# EAGLE board Cansat-2023-1 (EAGLE 9.4.2), part 1 of 2
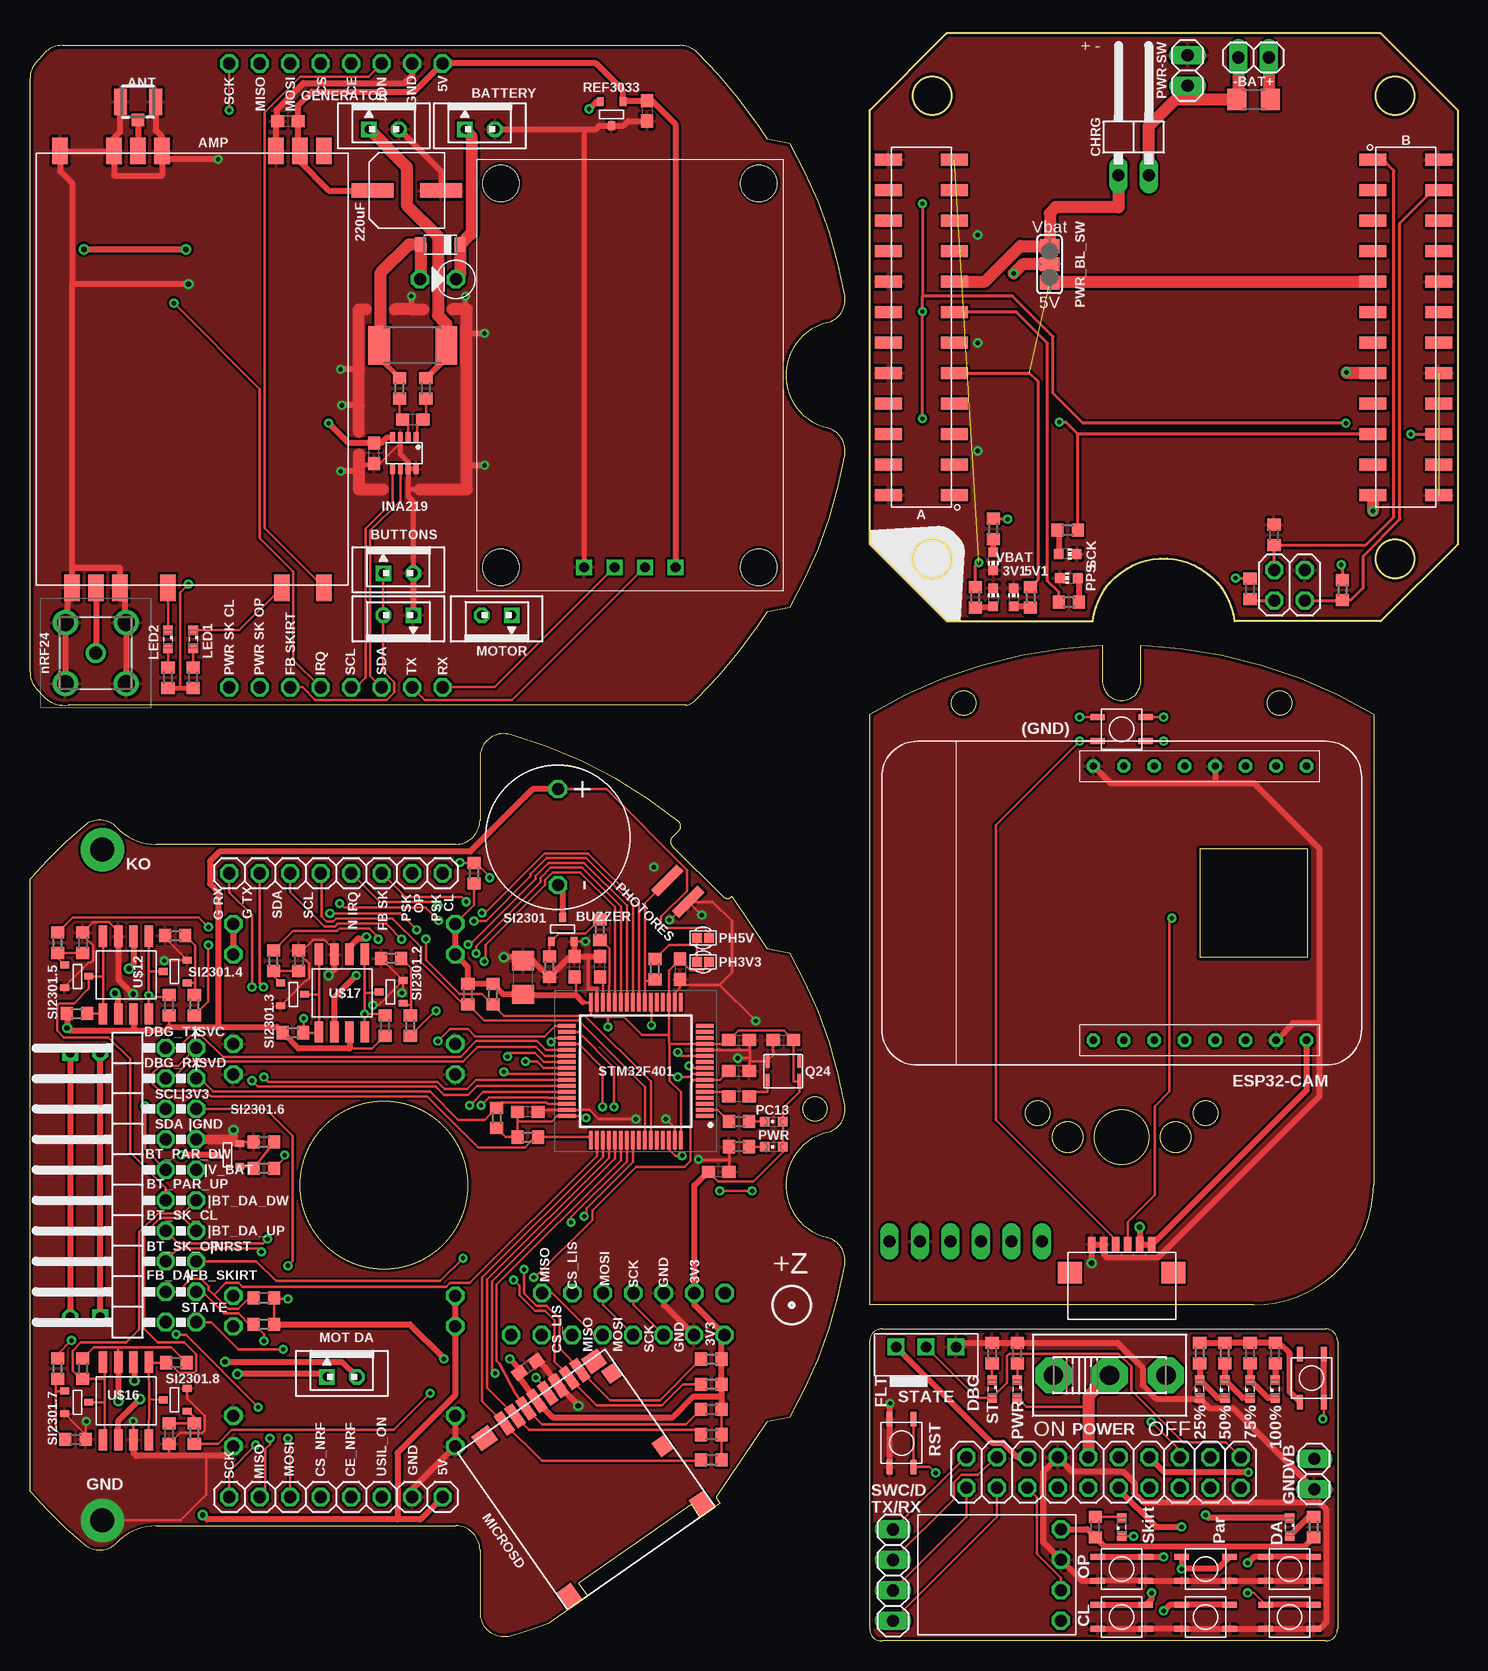
[diagram p0: board, top side]
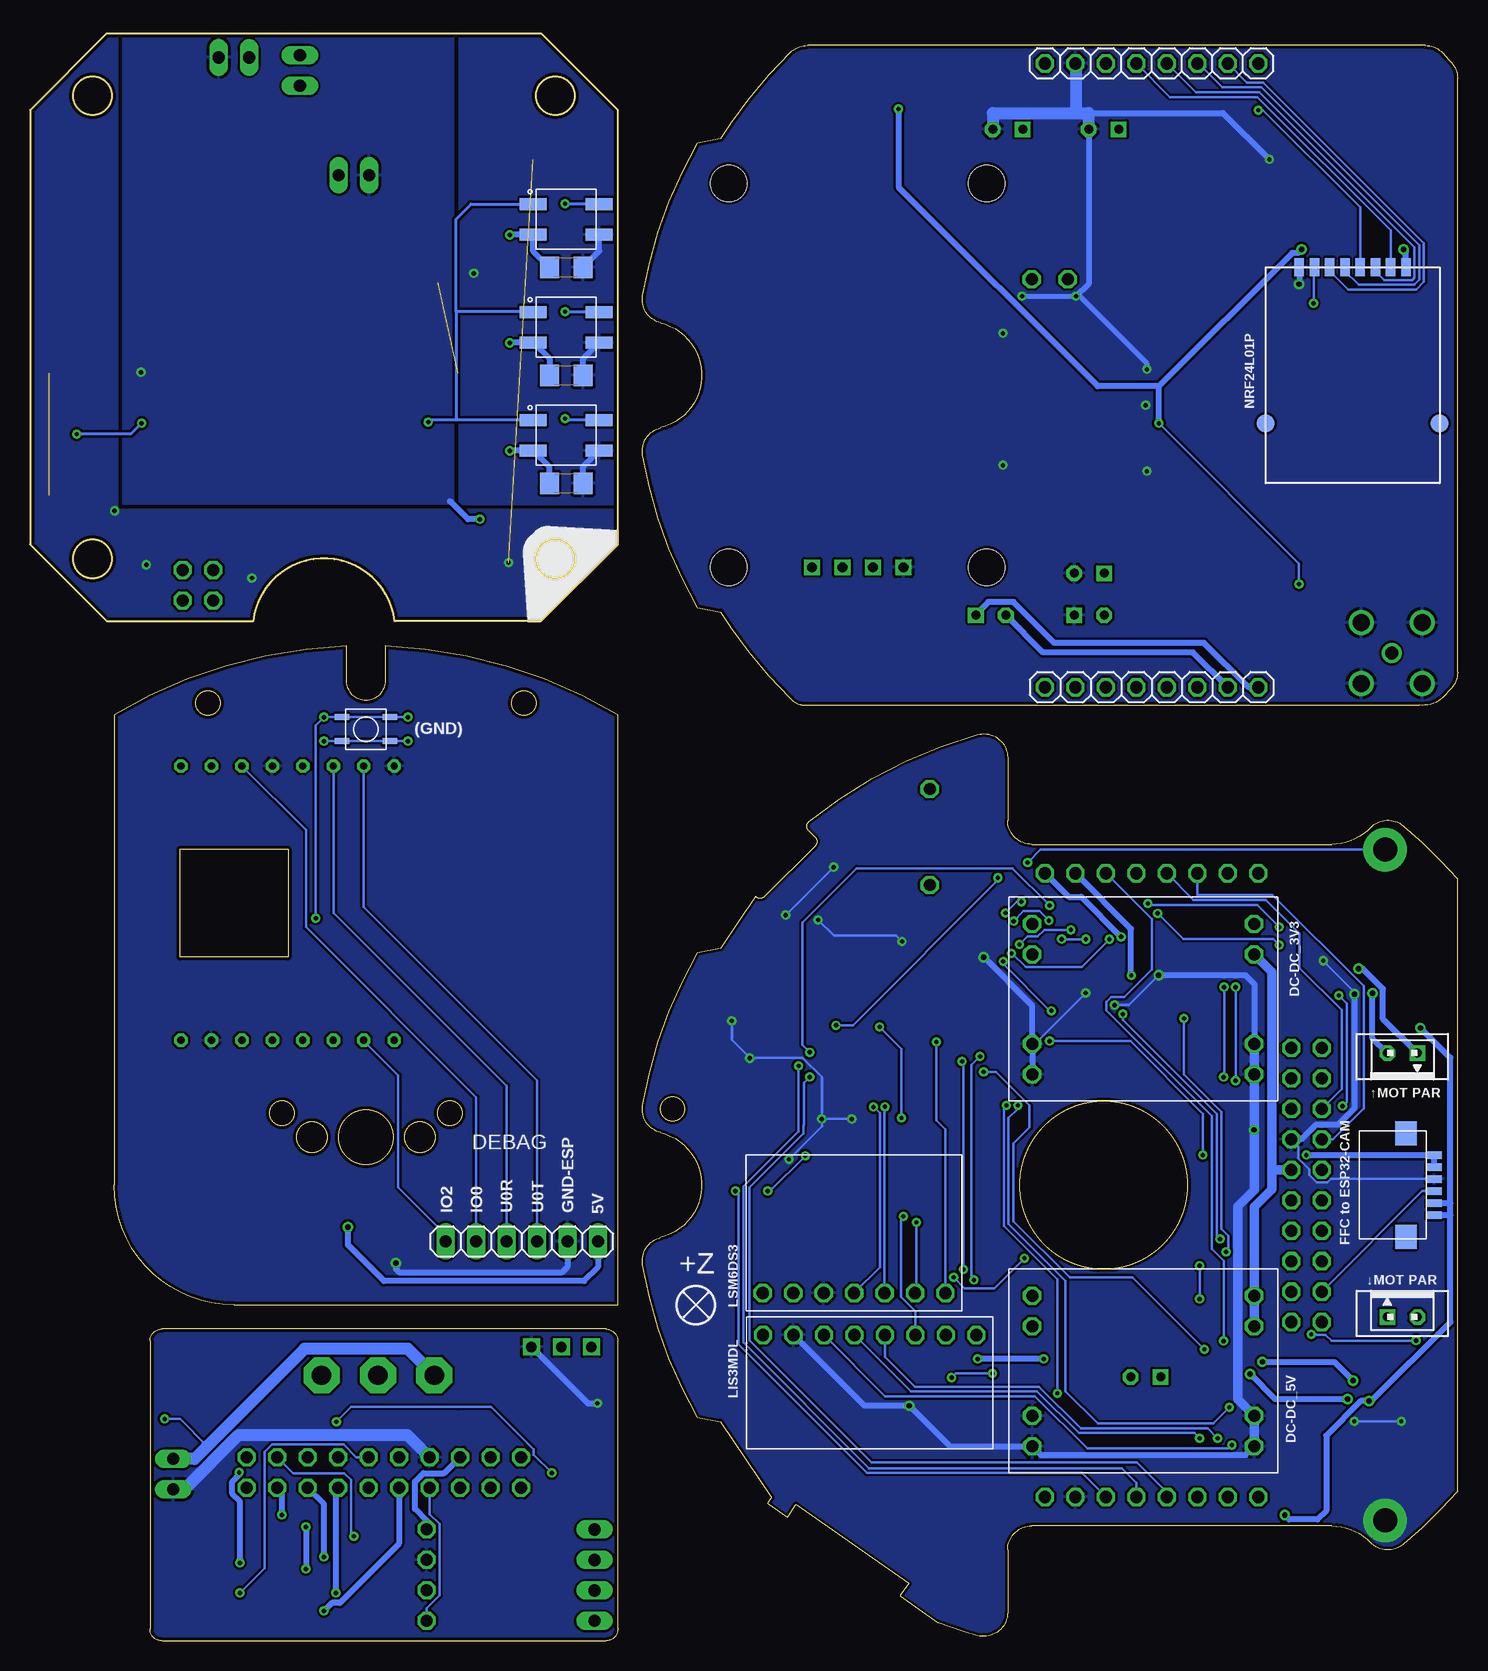
[diagram p1: board, bottom side, seen from below]

Size 119 x 134 mm. Coordinates in mm from the lower left corner, seen from the top.
Outline: 0,12.49 0,63.51 arc-9 4.52,67.95 arc-86 7.25,67.8 arc46 10.5,66.41 35.5,66.41 arc90 37.5,68.41 37.5,73.62 arc-106 40.04,75.55 arc-23 54.06,68.29 arc-96 54.1,67.55 53.54,66.99 arc90 53.54,66.28 57.78,62.04 arc90 58.49,62.04 58.51,62.06 61.43,57.73 63.36,57.35 arc-20 67.93,44.66 arc-86 66.43,42.37 arc153 66.43,33.63 arc-86 67.93,31.34 arc-20 63.36,18.65 61.43,18.27 57.17,11.96 57.51,11.47 55.88,10.32 55.13,11.38 45.75,4.81 46.49,3.75 43.32,1.53 arc-5 40.04,0.45 arc-106 37.5,2.38 37.5,7.59 arc90 35.5,9.59 10.5,9.59 arc46 7.25,8.2 arc-86 4.52,8.05 arc-9 0,12.49
Outline: 102,28 70,28 70,77.21 arc-29 89.4,82.97 89.4,80 arc180 92.6,80 92.6,82.97 arc-29 112,77.21 112,38 arc-90 102,28
Outline: 97.5,57 106.5,57 106.5,66 97.5,66 97.5,57
Outline: 70,1 70,25 arc-90 71,26 108,26 arc-90 109,25 109,1 arc-90 108,0 71,0 arc-90 70,1
Outline: 88.6,85 arc-166 100.4,85 112.6,85 119,91.4 119,127.6 112.6,134 76.4,134 70,127.6 70,91.4 76.4,85 88.6,85
Outline: 0,80.75 0,130.25 arc-42 0.51,131.59 arc-2 1.24,132.38 arc-46 2.69,133 54.2,133 arc-44 55.59,132.44 arc-12 60.59,126.47 61.43,125.23 63.36,124.85 arc-20 67.93,112.16 arc-86 66.43,109.87 arc153 66.43,101.13 arc-86 67.93,98.84 arc-20 63.36,86.15 61.43,85.77 60.59,84.53 arc-12 55.59,78.56 arc-44 54.7,78 3.19,78 arc-46 1.24,78.62 arc-2 0.51,79.41 arc-42 0,80.75
Outline: circle at 29.5,38 radius 7
Outline: circle at 65.45,44.34 radius 1
Outline: circle at 91,42 radius 2.25
Outline: circle at 95.5,42 radius 1.25
Outline: circle at 86.5,42 radius 1.25
Outline: circle at 104.17,78.18 radius 1
Outline: circle at 98,44 radius 1
Outline: circle at 77.83,78.18 radius 1
Outline: circle at 84,44 radius 1
Outline: circle at 113.8,90.2 radius 1.6
Outline: circle at 113.8,128.8 radius 1.6
Outline: circle at 75.2,128.8 radius 1.6
Outline: circle at 75.2,90.2 radius 1.6
Copper layers (1*16): Top 0.035mm / dielectric 1.5mm / Bottom 0.035mm
Design rules "default *": minimum track width 0.2mm, minimum drill 0.35mm, track to track 0.2mm, track to pad 0.2mm, pad to pad 0.2mm, via to via 0.2mm, smd to smd 0.2mm, copper to edge 0.25mm, drill to drill 6mil, minimum pad ring 10mil, minimum via ring 8mil, stop-mask expansion 4mil, vias tented up to drill 0mil, thermal gap 10mil

## Footprints (pad centres in the part's own frame; a part is rotated, then mirrored left to right if it is on the bottom)
4PINHEADERSMD = smd 2.25 x 1: 1 -2.75,1.27; 2 2.75,1.27; 3 -2.75,-1.27; 4 2.75,-1.27
CHIP-LED0603 = smd 0.8 x 0.8: A 0,-0.75; C 0,0.75
VIAS-CONNECT = smd 0.8 x 0.8: 1 -0.5,0; 2 0.5,0
1X02 = drill 1.016 long: 1 -1.27,0; 2 1.27,0
24PINHEADERSMD = smd 2.25 x 1: 1 -2.75,13.97; 2 2.75,13.97; 3 -2.75,11.43; 4 2.75,11.43; 5 -2.75,8.89; 6 2.75,8.89; 7 -2.75,6.35; 8 2.75,6.35; 9 -2.75,3.81; 10 2.75,3.81; 11 -2.75,1.27; 12 2.75,1.27; 13 -2.75,-1.27; 14 2.75,-1.27; 15 -2.75,-3.81; 16 2.75,-3.81; 17 -2.75,-6.35; 18 2.75,-6.35; 19 -2.75,-8.89; 20 2.75,-8.89; 21 -2.75,-11.43; 22 2.75,-11.43; 23 -2.75,-13.97; 24 2.75,-13.97
XQ-02A = smd 2.2 x 1.3: P$1 -18.2,-11; P$2 -18.2,-6.5; P$3 -18.2,-4.5; P$4 -18.2,-2.5; P$5 -18.2,9; P$6 -18.2,11; P$7 18.2,11; P$8 18.2,7.5; P$9 18.2,-2; P$10 18.2,-6; P$11 18.2,-8; P$12 18.2,-10; P$13 -18.2,7
B2B-PH-K-S = drill 0.75 pad 1.3 square: 1 1.25,0 | drill 0.75 pad 1.3 octagon: 2 -1.25,0
BUZZER-S8R12 = drill 1 octagon: P$1 -4,0; P$2 4,0
C0603 = smd 1.1 x 1: 1 -0.85,0; 2 0.85,0
C1206 = smd 1.6 x 1.8: 1 -1.4,0; 2 1.4,0
ECAP220-CMD = smd 1.2 x 3.5: P$1 0,2.85; P$2 0,-2.85
1X02/90 = drill 1.016 long: 1 -1.27,-3.81; 2 1.27,-3.81
SOD123 = smd 0.91 x 1.22: A 1.635,0; C -1.635,0
MP1584-B = drill 1.016 octagon: P$1 1.95,2.23; P$2 1.95,4.77; P$3 1.95,12.23; P$4 1.95,14.77; P$5 20.45,14.77; P$6 20.45,12.23; P$7 20.45,4.77; P$8 20.45,2.23
1X06 = drill 1.016 long: 1 -6.35,0; 2 -3.81,0; 3 -1.27,0; 4 1.27,0; 5 3.81,0; 6 6.35,0
BA159 = drill 1 octagon: P$1 -1.5,0; P$2 1.5,0
ESP32-CAM = drill 0.6 octagon: P$1 -11.43,-15.42; P$2 -11.43,-12.88; P$3 -11.43,-10.34; P$4 -11.43,-7.8; P$5 -11.43,-5.26; P$6 -11.43,-2.72; P$7 -11.43,-0.18; P$8 -11.43,2.36; P$9 11.43,-15.42; P$10 11.43,-12.88; P$11 11.43,-10.34; P$12 11.43,-7.8; P$13 11.43,-5.26; P$14 11.43,-2.72; P$15 11.43,-0.18; P$16 11.43,2.36
SOT23-8 = smd 0.9 x 0.4: 1 -1.3,0.975; 2 -1.3,0.325; 3 -1.3,-0.325; 4 -1.3,-0.975; 5 1.3,-0.975; 6 1.3,-0.325; 7 1.3,0.325; 8 1.3,0.975
MCXJPHSTTH1 = drill 1.1 pad 1.65: 1 0,0 | drill 1.4 pad 2.1: 2 -2.54,2.54; 3 -2.54,-2.54; 4 2.54,-2.54; 5 2.54,2.54
U.FL-R-SMT-1(10) = smd 1.05 x 2.2: 1 -1.475,0; 2 1.475,0 | smd 1.05 x 1.05: 3 0,1.525
2X10/90 = drill 1.016 octagon: 1 -11.43,-6.35; 2 -11.43,-3.81; 3 -8.89,-6.35; 4 -8.89,-3.81; 5 -6.35,-6.35; 6 -6.35,-3.81; 7 -3.81,-6.35; 8 -3.81,-3.81; 9 -1.27,-6.35; 10 -1.27,-3.81; 11 1.27,-6.35; 12 1.27,-3.81; 13 3.81,-6.35; 14 3.81,-3.81; 15 6.35,-6.35; 16 6.35,-3.81; 17 8.89,-6.35; 18 8.89,-3.81; 19 11.43,-6.35; 20 11.43,-3.81
1X04 = drill 1.016 long: 1 -3.81,0; 2 -1.27,0; 3 1.27,0; 4 3.81,0
1X08 = drill 1.016 pad 1.524 octagon: 1 -8.89,0; 2 -6.35,0; 3 -3.81,0; 4 -1.27,0; 5 1.27,0; 6 3.81,0; 7 6.35,0; 8 8.89,0
2X10 = drill 1.016 octagon: 1 -11.43,-1.27; 2 -11.43,1.27; 3 -8.89,-1.27; 4 -8.89,1.27; 5 -6.35,-1.27; 6 -6.35,1.27; 7 -3.81,-1.27; 8 -3.81,1.27; 9 -1.27,-1.27; 10 -1.27,1.27; 11 1.27,-1.27; 12 1.27,1.27; 13 3.81,-1.27; 14 3.81,1.27; 15 6.35,-1.27; 16 6.35,1.27; 17 8.89,-1.27; 18 8.89,1.27; 19 11.43,-1.27; 20 11.43,1.27
2X02 = drill 1.016 octagon: 1 -1.27,-1.27; 2 -1.27,1.27; 3 1.27,-1.27; 4 1.27,1.27
SML0603 = smd 0.8 x 0.8: A 0.75,0; C -0.75,0
LIS3MDL-CGMSU-NB2023 = drill 1.016 octagon: P$1 -8.89,-4; P$2 -6.35,-4; P$3 -3.81,-4; P$4 -1.27,-4; P$5 1.27,-4; P$6 3.81,-4; P$7 6.35,-4; P$8 8.89,-4
LSM6DS3-GY-NB2023 = drill 1.016 octagon: P$1 -7.62,-5; P$2 -5.08,-5; P$3 -2.54,-5; P$4 0,-5; P$5 2.54,-5; P$6 5.08,-5; P$7 7.62,-5
SD = smd 0.8 x 2: CLK 6,-15.77; CMD 8.2,-15.77; DAT0 3.8,-15.77; DAT1 2.7,-15.77; DAT2 10.4,-15.77; DAT3 9.3,-15.77; VDD 7.1,-15.77; VSS 4.9,-15.77 | smd 1.5 x 1.7: P$9 0.75,-0.85; P$13 14.25,-0.85 | smd 1.6 x 1.5: P$10 1.3,-15.7 | smd 1.29 x 1.3: P$11 0.645,-14.05 | smd 1.29 x 1.4: P$12 0.645,-6.65 | smd 1.7 x 1.5: P$14 12.45,-15.7
NRF24L01_ML01SP4 = smd 1.5 x 0.8: P$1 -9,4.445; P$2 -9,3.175; P$3 -9,1.905; P$4 -9,0.635; P$5 -9,-0.635; P$6 -9,-1.905; P$7 -9,-3.175; P$8 -9,-4.445 | smd 1.5 x 1.5: P$9 4,7.25; P$10 4,-7.25
CHIPLED_0603 = smd 0.8 x 0.8: A 0,-0.75; C 0,0.75
PHOTORES_VT93N1_SMD = smd 0.8 x 3: P$1 -1.25,0; P$2 1.25,0
SJ_2 = smd 1.168 x 1.6: 1 -1.524,0; 2 0,0; 3 1.524,0
Q24 = smd 0.3 x 1.2: P$1 -1.325,-0.85; P$2 1.325,-0.85; P$3 1.325,0.85; P$4 -1.325,0.85
R0603 = smd 1 x 1.1: 1 -0.85,0; 2 0.85,0
R2512 = smd 1.8 x 3.2: 1 -2.8,0; 2 2.8,0
SOT23-3 = smd 0.56 x 0.73: 1 -0.95,-1; 2 0.95,-1; 3 0,1
UNICS-SWITCH = drill 1.6 pad 3 octagon: 1 -4.7,0; 2 0,0; 3 4.7,0
QFP50P1200X1200X160-64N = smd 1.475 x 0.27: 1 -5.738,3.75; 2 -5.738,3.25; 3 -5.738,2.75; 4 -5.738,2.25; 5 -5.738,1.75; 6 -5.738,1.25; 7 -5.738,0.75; 8 -5.738,0.25; 9 -5.738,-0.25; 10 -5.738,-0.75; 11 -5.738,-1.25; 12 -5.738,-1.75; 13 -5.738,-2.25; 14 -5.738,-2.75; 15 -5.738,-3.25; 16 -5.738,-3.75; 33 5.738,-3.75; 34 5.738,-3.25; 35 5.738,-2.75; 36 5.738,-2.25; 37 5.738,-1.75; 38 5.738,-1.25; 39 5.738,-0.75; 40 5.738,-0.25; 41 5.738,0.25; 42 5.738,0.75; 43 5.738,1.25; 44 5.738,1.75; 45 5.738,2.25; 46 5.738,2.75; 47 5.738,3.25; 48 5.738,3.75 | smd 0.27 x 1.475: 17 -3.75,-5.738; 18 -3.25,-5.738; 19 -2.75,-5.738; 20 -2.25,-5.738; 21 -1.75,-5.738; 22 -1.25,-5.738; 23 -0.75,-5.738; 24 -0.25,-5.738; 25 0.25,-5.738; 26 0.75,-5.738; 27 1.25,-5.738; 28 1.75,-5.738; 29 2.25,-5.738; 30 2.75,-5.738; 31 3.25,-5.738; 32 3.75,-5.738; 49 3.75,5.738; 50 3.25,5.738; 51 2.75,5.738; 52 2.25,5.738; 53 1.75,5.738; 54 1.25,5.738; 55 0.75,5.738; 56 0.25,5.738; 57 -0.25,5.738; 58 -0.75,5.738; 59 -1.25,5.738; 60 -1.75,5.738; 61 -2.25,5.738; 62 -2.75,5.738; 63 -3.25,5.738; 64 -3.75,5.738
FFC-CONNECT-6P-SMD = smd 0.6 x 1.3: P$1 -7,0.65; P$2 -6,0.65; P$3 -5,0.65; P$4 -4,0.65; P$5 -3,0.65; P$6 -2,0.65 | smd 2 x 1.8: P$16 -0.2,-1.7; P$17 -8.8,-1.7
BTN_VERY_SMALL = smd 1.2 x 0.5: P$1 -2,1; P$2 2,1; P$3 2,-1; P$4 -2,-1
BME280-PINS-ONLY = drill 1.016 octagon: P$1 -3.81,5.33; P$2 -1.27,5.33; P$3 1.27,5.33; P$4 3.81,5.33
GPS = drill 0.8 square: GND -16,3.81; RX -16,-1.27; TX -16,1.27; UCC -16,-3.81 | hole 3: 16,10.75; -16,10.75; -16,-10.75; 16,-10.75
SO8 = smd 0.72 x 1.78: 1 -1.905,-3.23; 2 -0.635,-3.23; 3 0.635,-3.23; 4 1.905,-3.23; 5 1.905,3.23; 6 0.635,3.23; 7 -0.635,3.23; 8 -1.905,3.23
MSS12D01 = drill 0.9 square: P$1 0,0; P$2 2.5,0; P$3 -2.5,0

## Placement (x,y rotation side)
1  4-PIN  [4PINHEADERSMD]  74.3,118.5 0 bottom
2  4-PIN  [4PINHEADERSMD]  74.3,109.5 0 bottom
3  4-PIN  [4PINHEADERSMD]  74.3,100.5 0 bottom
3V1  [CHIP-LED0603]  80.3,87 0 top
3V3  [VIAS-CONNECT]  56.1,56.6 180 top
5V  [VIAS-CONNECT]  56.1,58.6 0 top
5V1  [CHIP-LED0603]  82,87 0 top
-BAT+  [1X02]  102,132 180 top
A  24-PIN  [24PINHEADERSMD]  74.3,109.5 180 top
AMP  XQ-02A  [XQ-02A]  13.5,106 270 top
B  24-PIN  [24PINHEADERSMD]  114.7,109.5 0 top
BATTERY  JST-2-K-S  [B2B-PH-K-S]  37.5,126 180 top
BUTTON-OP  JST-2-K-S  [B2B-PH-K-S]  30.7,85.5 0 top
BUTTONS  JST-2-K-S  [B2B-PH-K-S]  30.7,89 180 top
BUZZER  BUZZERS8R6  [BUZZER-S8R12]  44,67 270 top
C1  100nF  [C0603]  41.5,44.1 180 top
C2  10uF  [C1206]  41.1,55.3 90 top
C3  100nF  [C0603]  57.4,39.1 180 top
C4  100nF  [C0603]  45.4,56.2 90 top
C5  100nF  [C0603]  59.1,50.1 0 top
C6  100nF  [C0603]  54.2,56 270 top
C7  100nF  [C0603]  41.5,22.84 215 top
C8  1nF  [C0603]  59.1,45.4 0 top
C9  100nF  [C0603]  59.1,47.5 180 top
C10  10nF  [C0603]  62.8,50.1 0 top
C11  4.7uf  [C0603]  47.5,56.2 90 top
C12  100nF  [C0603]  51.42,127.55 270 top
C13  100nF  [C0603]  31.9,101.8 180 top
C14  100nF  [C0603]  28.7,99 90 top
C15  100nF  [C0603]  21.5,126.7 0 top
C16  220uF  [ECAP220-CMD]  31.4,120.9 90 top
C17  10µF  [C1206]  102,128.5 0 top
C18  10µF  [C1206]  74.3,114.5 0 bottom
C19  10µF  [C1206]  74.3,105.5 0 bottom
C20  10µF  [C1206]  74.3,96.5 0 bottom
CHRG  [1X02/90]  92,126 0 top
D1  D-MBR  [SOD123]  34.2,116.4 180 top
DC-DC_3V3  MP1584-B  [MP1584-B]  15,62 180 bottom
DC-DC_5V  MP1584-B  [MP1584-B]  15,31 180 bottom
DEBAG  [1X06]  78,33.3 180 bottom
DIP-4A  BA159  [BA159]  34,113.5 0 top
ESP32-CAM  ESP32-CAM  [ESP32-CAM]  91,61.5 90 top
GENERATOR  JST-2-K-S  [B2B-PH-K-S]  29.5,126 180 top
INA219  INA219AID  [SOT23-8]  31.2,99 270 top
J1  MCX-J-P-H-ST-TH1  [MCXJPHSTTH1]  5.49,82.35 0 top
J2  U.FL-R-SMT-1_10_  [U.FL-R-SMT-1(10)]  9,128.3 180 top
JP1  [2X10/90]  7.5,38 90 top
JP2  JST-2-K-S  [B2B-PH-K-S]  26,22 180 top
JP3  JST-2-K-S  [B2B-PH-K-S]  4.6,49 0 bottom
JP4  JST-2-K-S  [B2B-PH-K-S]  4.6,27 180 bottom
JP5  [1X04]  71.94,5.48 90 top
JP6  [1X08]  25.5,12 0 top
JP7  [1X08]  25.5,64 0 top
JP8  [1X02]  107.06,13.91 270 top
JP9  [2X10]  89.5,14.04 180 top
JP10  [2X02]  105,88 180 top
JP11  [1X08]  25.5,131.5 180 bottom
JP12  [1X08]  25.5,79.5 0 bottom
LED1  [SML0603]  13.6,83.5 270 top
LED2  [SML0603]  11.5,83.5 270 top
LED3  [SML0603]  97.5,21 90 top
LED4  [SML0603]  99.6,21 90 top
LED5  [SML0603]  101.7,21 90 top
LED6  [SML0603]  103.8,21 90 top
LED7  [SML0603]  91,9.5 90 top
LED8  [SML0603]  105,9.5 270 top
LED9  [SML0603]  82.3,21 270 top
LED10  [SML0603]  80.2,21 270 top
LIS3MDL  LIS3MDL-CJMCUБез_отв._зеркальный  [LIS3MDL-CGMSU-NB2023]  49,21.5 180 top
LSM6DS3  LSM6DS3-GY-NB2023  [LSM6DS3-GY-NB2023]  50.3,34 0 top
MICROSD  SD  [SD]  57.1,11.18 215 top
MOTOR  JST-2-K-S  [B2B-PH-K-S]  38.9,85.5 0 top
NRF24L01P  NRF24L01_ML01SP4  [NRF24L01_ML01SP4]  8.75,105.5 270 bottom
PC13  [CHIPLED_0603]  62,43.3 90 top
PHOTORES  PHOTORES_VT93N1  [PHOTORES_VT93N1_SMD]  54,62.5 135 top
PPS  [CHIP-LED0603]  86.6,88.6 90 top
PWR  [CHIPLED_0603]  62,41.2 90 top
PWR-SW  [1X02]  96.5,130.9 270 top
PWR_BL_SW  [SJ_2]  85,114.75 90 top
Q24  Q24  [Q24]  62.8,47.5 180 top
R1  10k  [R0603]  19.5,26.4 0 top
R2  3k3  [R0603]  56.8,15.1 0 top
R3  2k  [R0603]  59.1,41.2 0 top
R4  2k  [R0603]  59.1,43.3 0 top
R5  10k  [R0603]  38.9,43.6 270 top
R6  10k  [R0603]  41.5,42 180 top
R7  3k3  [R0603]  56.8,17.2 0 top
R8  3k3  [R0603]  56.8,19.3 0 top
R9  3k3  [R0603]  56.8,21.4 0 top
R10  3k3  [R0603]  56.8,23.5 0 top
R11  10k  [R0603]  3.8,16.8 180 top
R12  10k  [R0603]  12.2,23.2 0 top
R13  10k  [R0603]  4.4,22.7 90 top
R14  10k  [R0603]  11.6,17.3 90 top
R15  100R  [R0603]  2.3,22.7 270 top
R16  100R  [R0603]  13.7,17.3 270 top
R17  191k/2k  [R0603]  52.1,56 270 top
R18  10k  [R0603]  12.1,58.8 0 top
R19  10k  [R0603]  3.9,52.3 180 top
R20  10k  [R0603]  11.6,53 270 top
R21  10k  [R0603]  4.4,58.2 270 top
R22  100R  [R0603]  13.7,53 90 top
R23  100R  [R0603]  2.3,58.2 90 top
R24  10k  [R0603]  30.1,56.9 0 top
R25  10k  [R0603]  21.9,50.7 180 top
R26  10k  [R0603]  29.6,51.3 270 top
R27  10k  [R0603]  22.4,56.7 270 top
R28  100R  [R0603]  31.7,51.3 90 top
R29  100R  [R0603]  20.3,56.7 90 top
R30  100R  [R0603]  47.5,59.3 90 top
R31  10k  [R0603]  43.3,56.2 270 top
R32  3k9  [R0603]  37.02,64 90 top
R33  10k  [R0603]  19.5,41.6 0 top
R34  100R  [R0603]  19.5,39.4 180 top
R35  10k  [R0603]  19.5,28.6 180 top
R36  4k7  [R0603]  38.6,53.9 90 top
R37  4k7  [R0603]  36.5,53.9 90 top
R38  100R  [R0603]  33,104.4 270 top
R39  100R  [R0603]  30.8,104.4 270 top
R40  2k  [R0603]  13.6,80.3 270 top
R41  2k  [R0603]  11.5,80.3 270 top
R42  R05  [R2512]  31.9,108 180 top
R43  1k  [R0603]  97.5,24 270 top
R44  1k  [R0603]  99.6,24 270 top
R45  1k  [R0603]  101.7,24 270 top
R46  1k  [R0603]  103.8,24 270 top
R47  2k  [R0603]  88.8,9.5 270 top
R48  2k  [R0603]  107,9.5 270 top
R49  5K1  [R0603]  82.3,24 90 top
R50  2k  [R0603]  80.2,24 90 top
R51  1k  [R0603]  86.5,92.6 0 top
R52  2k  [R0603]  83.4,87 90 top
R53  1k  [R0603]  78.8,87 90 top
R54  2k  [R0603]  86.6,86.6 180 top
R55  [R0603]  109.4,87.6 90 top
R56  5k1  [R0603]  103.7,92.2 270 top
R57  100R  [R0603]  101.7,87.7 90 top
R58  1k  [R0603]  80.3,92.7 90 top
REF3033  REF3033  [SOT23-3]  48.48,127.31 180 top
S1  [UNICS-SWITCH]  90,22.15 0 top
SCK  [CHIP-LED0603]  86.5,90.6 270 top
SI2301  MOSFET-N  [SOT23-3]  44.4,59.3 0 top
SI2301.2  MOSFET-N  [SOT23-3]  30.1,54.1 90 top
SI2301.3  MOSFET-N  [SOT23-3]  21.9,53.9 270 top
SI2301.4  MOSFET-N  [SOT23-3]  12.1,55.8 90 top
SI2301.5  MOSFET-N  [SOT23-3]  3.9,55.4 270 top
SI2301.6  MOSFET-N  [SOT23-3]  16.5,40.5 90 top
SI2301.7  MOSFET-N  [SOT23-3]  3.9,19.9 270 top
SI2301.8  MOSFET-N  [SOT23-3]  12.1,20.1 90 top
STM32F401  STM32F401RCT6  [QFP50P1200X1200X160-64N]  50.5,47.5 180 top
U$1  FCC-CONNECT-6P  [FFC-CONNECT-6P-SMD]  95.5,32.4 0 top
U$2  BTN_VERY_SMALL  [BTN_VERY_SMALL]  91,76 0 top
U$3  BTN_VERY_SMALL  [BTN_VERY_SMALL]  91,76 0 bottom
U$4  BME280BME280-PINS-ONLY  [BME280-PINS-ONLY]  80.6,5.5 270 top
U$5  GPS  [GPS]  50,105.5 90 top
U$6  BTN_VERY_SMALL  [BTN_VERY_SMALL]  106.84,21.91 270 top
U$7  BTN_VERY_SMALL  [BTN_VERY_SMALL]  72.65,16.51 270 top
U$8  FCC-CONNECT-6P  [FFC-CONNECT-6P-SMD]  2.6,33.5 270 bottom
U$9  BTN_VERY_SMALL  [BTN_VERY_SMALL]  105,2 0 top
U$10  BTN_VERY_SMALL  [BTN_VERY_SMALL]  105,6 0 top
U$11  BTN_VERY_SMALL  [BTN_VERY_SMALL]  98,2 0 top
U$12  MOSFET_2P+2N_AP9930GM  [SO8]  8,55.5 180 top
U$13  BTN_VERY_SMALL  [BTN_VERY_SMALL]  98,6 0 top
U$14  BTN_VERY_SMALL  [BTN_VERY_SMALL]  91,6 0 top
U$15  BTN_VERY_SMALL  [BTN_VERY_SMALL]  91,2 0 top
U$16  MOSFET_2P+2N_AP9930GM  [SO8]  8,20 0 top
U$17  MOSFET_2P+2N_AP9930GM  [SO8]  26,54 180 top
U$18  MSS12D01  [MSS12D01]  74.7,24.5 180 top
VBAT  [CHIP-LED0603]  80.3,90 180 top

## Library data of the parts
1-3 A B Q24 = CanCubeSat
3V1 5V1 LED1-LED10 PC13 PPS PWR SCK VBAT = led
3V3 5V AMP BATTERY BUTTON-OP BUTTONS BUZZER C16 DC-DC_3V3 DC-DC_5V DIP-4A ESP32-CAM GENERATOR INA219 JP2-JP4 JP6 JP7 JP11 JP12 LIS3MDL LSM6DS3 MICROSD MOTOR NRF24L01P PHOTORES REF3033 SI2301 SI2301.2-SI2301.8 U$1-U$4 U$6-U$18 = NEON-BLADE-2023
-BAT+ CHRG DEBAG JP1 JP5 JP8-JP10 PWR-SW = pinhead
C1-C15 C17-C20 = rcl; SPICEPREFIX: C
D1 = NEON-BLADE-2023; AVAILABILITY: Good; DESCRIPTION: Diode Schottky 20V 500mA Surface Mount SOD-123; MF: ON Semiconductor; MP: MBR0520LT1G; PACKAGE: SOD-123-2 ON Semiconductor; PRICE: None; PURCHASE-URL: https://pricing.snapeda.com/search/part/MBR0520LT1G/?ref=eda
J1 = MCX-J-P-H-ST-TH1; ARROW_PART_NUMBER: MCX-J-P-H-ST-TH1; ARROW_PRICE-STOCK: https://www.arrow.com/en/products/mcx-j-p-h-st-th1/samtec?region=nac; DESCRIPTION: Samtec MCXSeries, Through Hole MCX Jack jack, 50 Impedance, Solder Termination, 0 6GHz, Coaxial cable type; HEIGHT: 5.81mm; MANUFACTURER_NAME: SAMTEC; MANUFACTURER_PART_NUMBER: MCX-J-P-H-ST-TH1; MOUSER_PART_NUMBER: 200-MCXJPHSTTH1; MOUSER_PRICE-STOCK: https://www.mouser.co.uk/ProductDetail/Samtec/MCX-J-P-H-ST-TH1?qs=Cqqh%252BS766wnNti0C6DXzpQ%3D%3D
J2 = U.FL-R-SMT-1_10_; ARROW_PART_NUMBER: U.FL-R-SMT-1(10); ARROW_PRICE-STOCK: https://www.arrow.com/en/products/u.fl-r-smt-1-10/hirose-electric; DESCRIPTION: UFL SMT PCB receptable,DC-6GHz Hirose Straight 50 Surface Mount UFL Connector, Receptacle, Solder Termination Coaxial; HEIGHT: mm; MANUFACTURER_NAME: Hirose; MANUFACTURER_PART_NUMBER: U.FL-R-SMT-1(10); MOUSER_PART_NUMBER: 798-U.FL-R-SMT-110; MOUSER_PRICE-STOCK: https://www.mouser.co.uk/ProductDetail/Hirose-Connector/U.FL-R-SMT-110?qs=kL1ClTr6oBoOdtqlGQpQrQ%3D%3D
PWR_BL_SW = jumper
R1-R58 = rcl; SPICEPREFIX: R
S1 U$5 = cansat-lib
STM32F401 = STM32F401RCT6; ARROW_PART_NUMBER: STM32F401RCT6; ARROW_PRICE-STOCK: https://www.arrow.com/en/products/stm32f401rct6/stmicroelectronics?region=nac; DESCRIPTION: 32-Bit MCU Cortex-M4 256KB 1.8V LQFP64 STMicroelectronics STM32F401RCT6, 32bit ARM Cortex M4 MCU, 84MHz, 256 kB Flash, 64-Pin LQFP; HEIGHT: 1.6mm; MANUFACTURER_NAME: STMicroelectronics; MANUFACTURER_PART_NUMBER: STM32F401RCT6; MOUSER_PART_NUMBER: 511-STM32F401RCT6; MOUSER_PRICE-STOCK: https://www.mouser.co.uk/ProductDetail/STMicroelectronics/STM32F401RCT6?qs=DqCdCwOw4%2F4JITyspz8omA%3D%3D

## Nets
3V1: C14.2 INA219.4 NRF24L01P.P$1 R40.2 R41.2 REF3033.2
3V2: JP9.15 R47.2 R48.2 U$4.P$1 U$18.P$2
3V3: 3V3.1 C1.2 C2.1 C3.2 C4.1 C5.1 C6.1 C7.2 C10.2 DC-DC_3V3.P$7 DC-DC_3V3.P$8 JP1.15 LIS3MDL.P$1 LSM6DS3.P$6 MICROSD.VDD PC13.A PWR.A Q24.P$4 R1.2 R2.2 R5.2 R6.2 R7.2 R8.2 R9.2 R10.2 R32.1 R35.1 R36.2 R37.2 STM32F401.13 STM32F401.19 STM32F401.32 STM32F401.48 STM32F401.64
5V: 5V.2 BUZZER.P$1 DC-DC_5V.P$7 DC-DC_5V.P$8 JP6.8 R12.2 R13.2 R19.2 R20.2 R25.2 R26.2 U$8.P$5 U$8.P$6 U$12.7 U$16.7 U$17.7
5V1: AMP.P$5 C12.1 C15.2 C16.P$1 JP11.8 REF3033.1 U$5.UCC
5V2: DEBAG.1 ESP32-CAM.P$1 U$1.P$5 U$1.P$6
+3V3: A.23 B.23 R53.2 R55.2 R57.2
+5V: A.9 B.9 PWR_BL_SW.1 R52.2
BASS_BUZZER: R30.1 STM32F401.29
BOTTON_DA_DOWN: JP1.9 R13.1 SI2301.7.3 U$16.1 U$16.8
BOTTON_DA_DOWN1: JP9.9 U$9.P$1 U$9.P$2
BOTTON_DA_UP: JP1.7 R12.1 SI2301.8.3 U$16.4 U$16.5
BOTTON_DA_UP1: JP9.7 U$10.P$1 U$10.P$2
BOTTON_PAR_DOWN: JP1.12 R20.1 SI2301.4.3 U$12.1 U$12.8
BOTTON_PAR_DOWN1: JP9.12 U$11.P$1 U$11.P$2
BOTTON_PAR_UP: JP1.10 R19.1 SI2301.5.3 U$12.4 U$12.5
BOTTON_PAR_UP1: JP9.10 U$13.P$1 U$13.P$2
BOTTON_SKIRT_CLOSE: JP1.8 R26.1 SI2301.2.3 U$17.1 U$17.8
BOTTON_SKIRT_CLOSE1: JP9.8 U$15.P$1 U$15.P$2
BOTTON_SKIRT_OPEN: JP1.6 R25.1 SI2301.3.3 U$17.4 U$17.5
BOTTON_SKIRT_OPEN1: JP9.6 U$14.P$1 U$14.P$2
CE_NRF: JP6.5 STM32F401.9
CE_NRF1: JP11.5 NRF24L01P.P$2
CS_LIS: LIS3MDL.P$6 STM32F401.56
CS_LSM: LSM6DS3.P$2 STM32F401.55
CS_NRF: JP6.4 STM32F401.8
CS_NRF1: JP11.4 NRF24L01P.P$3
DBG_RX: JP1.18 STM32F401.38
DBG_RX1: JP5.1 JP9.18
DBG_TX: JP1.20 STM32F401.37
DBG_TX1: JP5.2 JP9.20
ESP_EN: R34.1 STM32F401.33
FEEDBACK_DA: JP1.4 R35.2 STM32F401.50 U$8.P$4
FEEDBACK_DA1: U$1.P$4 U$2.P$1 U$2.P$2 U$3.P$1 U$3.P$2
FEEDBACK_DA2: JP9.4 LED8.C
FEEDBACK_SKIRT: JP1.3 JP7.6 R1.1 STM32F401.24
FEEDBACK_SKIRT1: BUTTON-OP.2 BUTTONS.1 JP12.6
FEEDBACK_SKIRT2: JP9.3 LED7.C
GND: C1.1 C2.2 C3.1 C4.2 C5.2 C6.2 C7.1 C9.1 C10.1 C11.2 DC-DC_3V3.P$3 DC-DC_3V3.P$4 DC-DC_3V3.P$5 DC-DC_3V3.P$6 DC-DC_5V.P$3 DC-DC_5V.P$4 DC-DC_5V.P$5 DC-DC_5V.P$6 JP1.13 JP6.7 LIS3MDL.P$2 LSM6DS3.P$5 MICROSD.VSS PHOTORES.P$1 Q24.P$2 R3.1 R11.1 R14.1 R18.1 R21.1 R24.1 R27.1 R31.2 R33.1 SI2301.2 SI2301.2.2 SI2301.3.2 SI2301.4.2 SI2301.5.2 SI2301.6.2 SI2301.7.2 SI2301.8.2 STM32F401.12 STM32F401.18 STM32F401.31 STM32F401.47 STM32F401.63 U$8.P$3 U$12.3 U$16.3 U$17.3
GND1: AMP.P$1 AMP.P$2 AMP.P$4 AMP.P$10 AMP.P$12 AMP.P$13 BATTERY.2 BUTTON-OP.1 BUTTONS.2 C12.2 C14.1 C15.1 C16.P$2 GENERATOR.2 INA219.3 INA219.7 INA219.8 J1.2 J1.3 J1.4 J1.5 J2.1 J2.2 JP11.7 NRF24L01P.P$8 REF3033.3 U$5.GND
GND2: U$1.P$3 U$2.P$3 U$2.P$4 U$3.P$3 U$3.P$4
GND3: JP8.2 JP9.13 LED3.C R49.2 R50.2 U$4.P$2 U$7.P$3 U$7.P$4 U$9.P$3 U$9.P$4 U$10.P$3 U$10.P$4 U$11.P$3 U$11.P$4 U$13.P$3 U$13.P$4 U$14.P$3 U$14.P$4 U$15.P$3 U$15.P$4 U$18.P$3
GND4: 1.3 2.3 3.3 3V1.C 5V1.C A.2 A.10 A.16 A.24 B.2 B.10 B.16 B.24 C18.1 C19.1 C20.1 JP10.1 PPS.C PWR-SW.1 R56.1 SCK.C VBAT.C
GND_ESP: SI2301.6.3 U$8.P$1 U$8.P$2
GND_ESP1: DEBAG.2 ESP32-CAM.P$2 ESP32-CAM.P$12 ESP32-CAM.P$16 U$1.P$1 U$1.P$2
GPS_RX: JP7.1 STM32F401.43
GPS_RX1: JP12.1 U$5.TX
GPS_TX: JP7.2 STM32F401.42
GPS_TX1: JP12.2 U$5.RX
IO0: DEBAG.5 ESP32-CAM.P$11
IO2: DEBAG.6 ESP32-CAM.P$7
KO: R32.2 STM32F401.22
LED: R4.1 STM32F401.2
LED1: AMP.P$8 LED1.C
LED2: AMP.P$9 LED2.C
MISO: JP6.2 LIS3MDL.P$5 LSM6DS3.P$1 STM32F401.35
MISO1: JP11.2 NRF24L01P.P$6
MOSI: JP6.3 LIS3MDL.P$4 LSM6DS3.P$3 STM32F401.36
MOSI1: JP11.3 NRF24L01P.P$5
MOTOR_DA_DOWN: R15.1 STM32F401.44
MOTOR_DA_UP: R16.2 STM32F401.45
MOTOR_PAR_DOWN: R22.1 STM32F401.26
MOTOR_PAR_UP: R23.2 STM32F401.25
MOTOR_SKIRT_CLOSE: R28.1 STM32F401.28
MOTOR_SKIRT_OPEN: R29.2 STM32F401.27
N$1: R30.2 R31.1 SI2301.1
N$2: R11.2 R15.2 SI2301.7.1
N$3: R18.2 R22.2 SI2301.4.1
N$4: R33.2 R34.2 SI2301.6.1
N$5: JP3.1 JP4.2 U$12.2
N$6: JP2.1 U$16.2
N$7: JP2.2 U$16.6
N$8: R14.2 R16.1 SI2301.8.1
N$9: JP3.2 JP4.1 U$12.6
N$10: C8.2 Q24.P$3
N$11: R21.2 R23.1 SI2301.5.1
N$12: C11.1 STM32F401.30
N$13: 3V3.2 5V.1 R17.1
N$14: R24.2 R28.2 SI2301.2.1
N$15: C13.1 INA219.1 R38.2
N$16: C13.2 INA219.2 R39.2
N$17: R27.2 R29.1 SI2301.3.1
N$18: BATTERY.1 D1.C DIP-4A.P$2
N$19: GENERATOR.1 R38.1 R42.1
N$20: BUZZER.P$2 SI2301.3
N$21: AMP.P$3 J2.3
N$22: AMP.P$11 J1.1
N$23: LED1.A R40.1
N$24: LED2.A R41.1
N$25: D1.A DIP-4A.P$1 R39.1 R42.2
N$26: LED3.A LED4.C R43.2
N$27: LED4.A LED5.C R44.2
N$28: LED5.A LED6.C R45.2
N$29: LED6.A R46.2
N$30: JP8.1 S1.1 U$6.P$1 U$6.P$2
N$31: LED7.A R47.1
N$32: LED8.A R48.1
N$33: LED9.C R49.1
N$34: LED10.C R50.1
N$35: R43.1 R44.1 R45.1 R46.1 U$6.P$3
N$36: PWR.C R3.2
N$37: PC13.C R4.2
N$38: R51.1 SCK.A
N$39: 5V1.A R52.1
N$40: 3V1.A R53.1
N$41: PPS.A R54.1
N$42: -BAT+.2 C17.1 CHRG.2 PWR-SW.2
N$43: JP10.4 R57.1
N$44: R58.1 VBAT.A
NRF_IRQ: JP7.5 STM32F401.11
NRF_IRQ1: JP12.5 NRF24L01P.P$7
NRST: C9.2 JP1.5 STM32F401.7
NRST1: JP9.5 U$7.P$1 U$7.P$2
PHOT: B.4 JP10.2 R55.1
PHOTORES: PHOTORES.P$2 R17.2 STM32F401.23
POWER_SKIRT_CLOSE: JP7.8 U$17.2
POWER_SKIRT_CLOSE1: JP12.8 MOTOR.1
POWER_SKIRT_OPEN: JP7.7 U$17.6
POWER_SKIRT_OPEN1: JP12.7 MOTOR.2
PPS: A.13 R54.2
SCK: JP6.1 LIS3MDL.P$3 LSM6DS3.P$4 STM32F401.34
SCK1: JP11.1 NRF24L01P.P$4
SCL: JP1.16 JP7.4 R37.1 STM32F401.58
SCL1: INA219.5 JP12.4
SCL2: JP9.16 U$4.P$3
SCL3: 1.1 2.1 3.1 B.19 R51.2
SDA: JP1.14 JP7.3 R36.1 STM32F401.59
SDA1: INA219.6 JP12.3
SDA2: JP9.14 U$4.P$4
SDA3: 1.2 2.2 3.2 B.20
SDIO_CK: MICROSD.CLK STM32F401.53
SDIO_CMD: MICROSD.CMD R8.1 STM32F401.54
SDIO_DAT0: MICROSD.DAT0 R9.1 STM32F401.39
SDIO_DAT1: MICROSD.DAT1 R10.1 STM32F401.40
SDIO_DAT2: MICROSD.DAT2 R2.1 STM32F401.51
SDIO_DAT3: MICROSD.DAT3 R7.1 STM32F401.52
ST-SW: B.1 JP10.3 R56.2
STATE: JP1.1 STM32F401.41
STATE1: JP9.1 LED10.A U$18.P$1
SVC: JP1.19 R6.1 STM32F401.49
SVD: JP1.17 R5.1 STM32F401.46
SWC: JP5.4 JP9.19
SWD: JP5.3 JP9.17
TCXO: C8.1 STM32F401.5
U0R: DEBAG.4 ESP32-CAM.P$14
U0T: DEBAG.3 ESP32-CAM.P$15
USIL_ON: JP6.6 STM32F401.62
USIL_ON1: AMP.P$7 JP11.6
V+: -BAT+.1 A.15 B.15 C17.2 CHRG.1 PWR_BL_SW.3 R58.2
V_BAT: DC-DC_3V3.P$1 DC-DC_3V3.P$2 DC-DC_5V.P$1 DC-DC_5V.P$2 JP1.11
V_BAT1: JP9.11 LED9.A S1.2
VCC: 1.4 2.4 3.4 C18.2 C19.2 C20.2 PWR_BL_SW.2